# Altium PCB BK5932.PcbDoc (part 1 of 2)
Units mm, origin at the board's own origin, x right, y up, seen from the top; angles counter-clockwise.
Board outline 27.94 x 28.57 mm, 2 copper layers (Top Layer, Bottom Layer); 30 components, 25 nets, 105 pads, 28 vias.
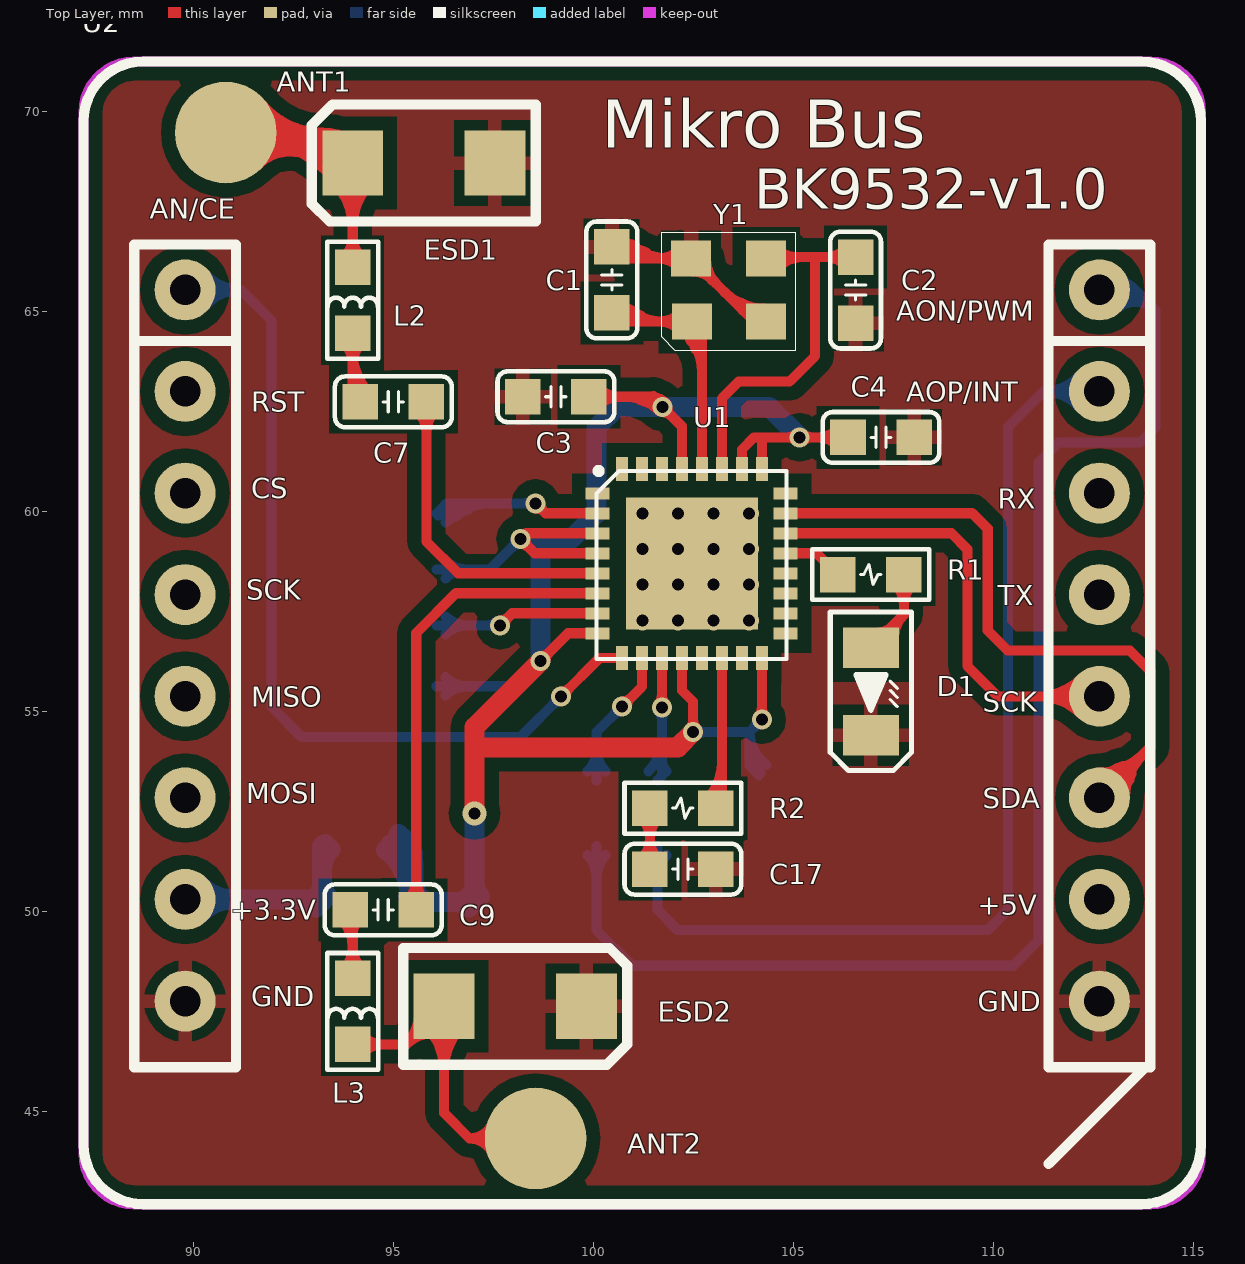
[diagram p0: Top Layer view]
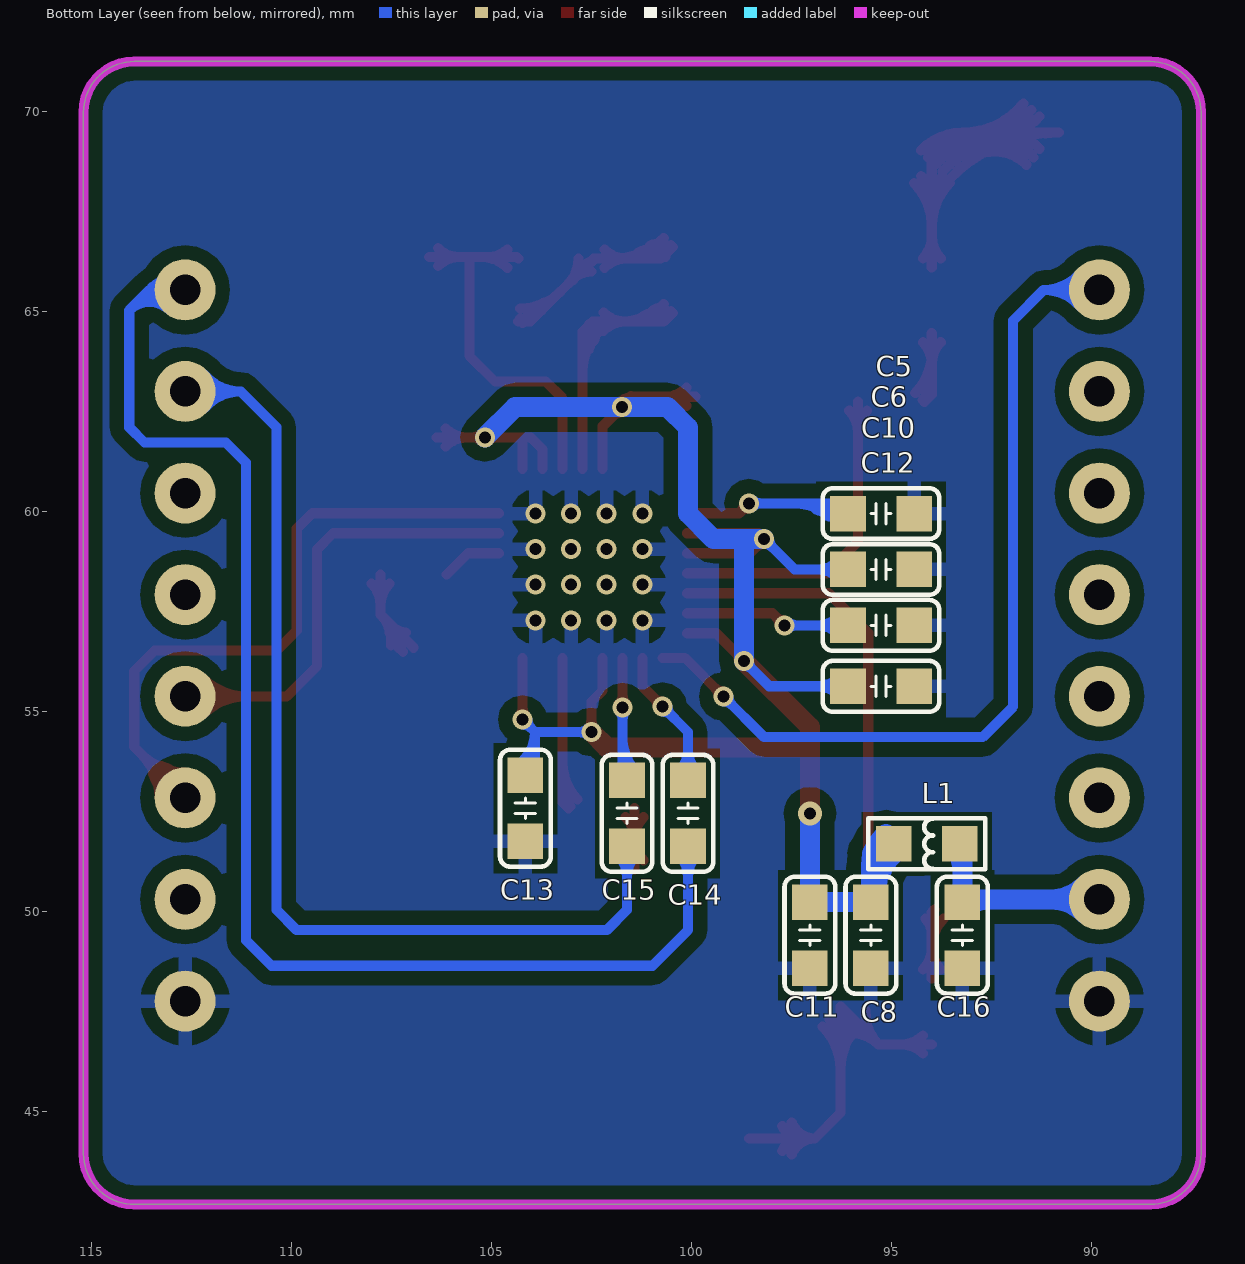
[diagram p1: Bottom Layer view, seen from below]
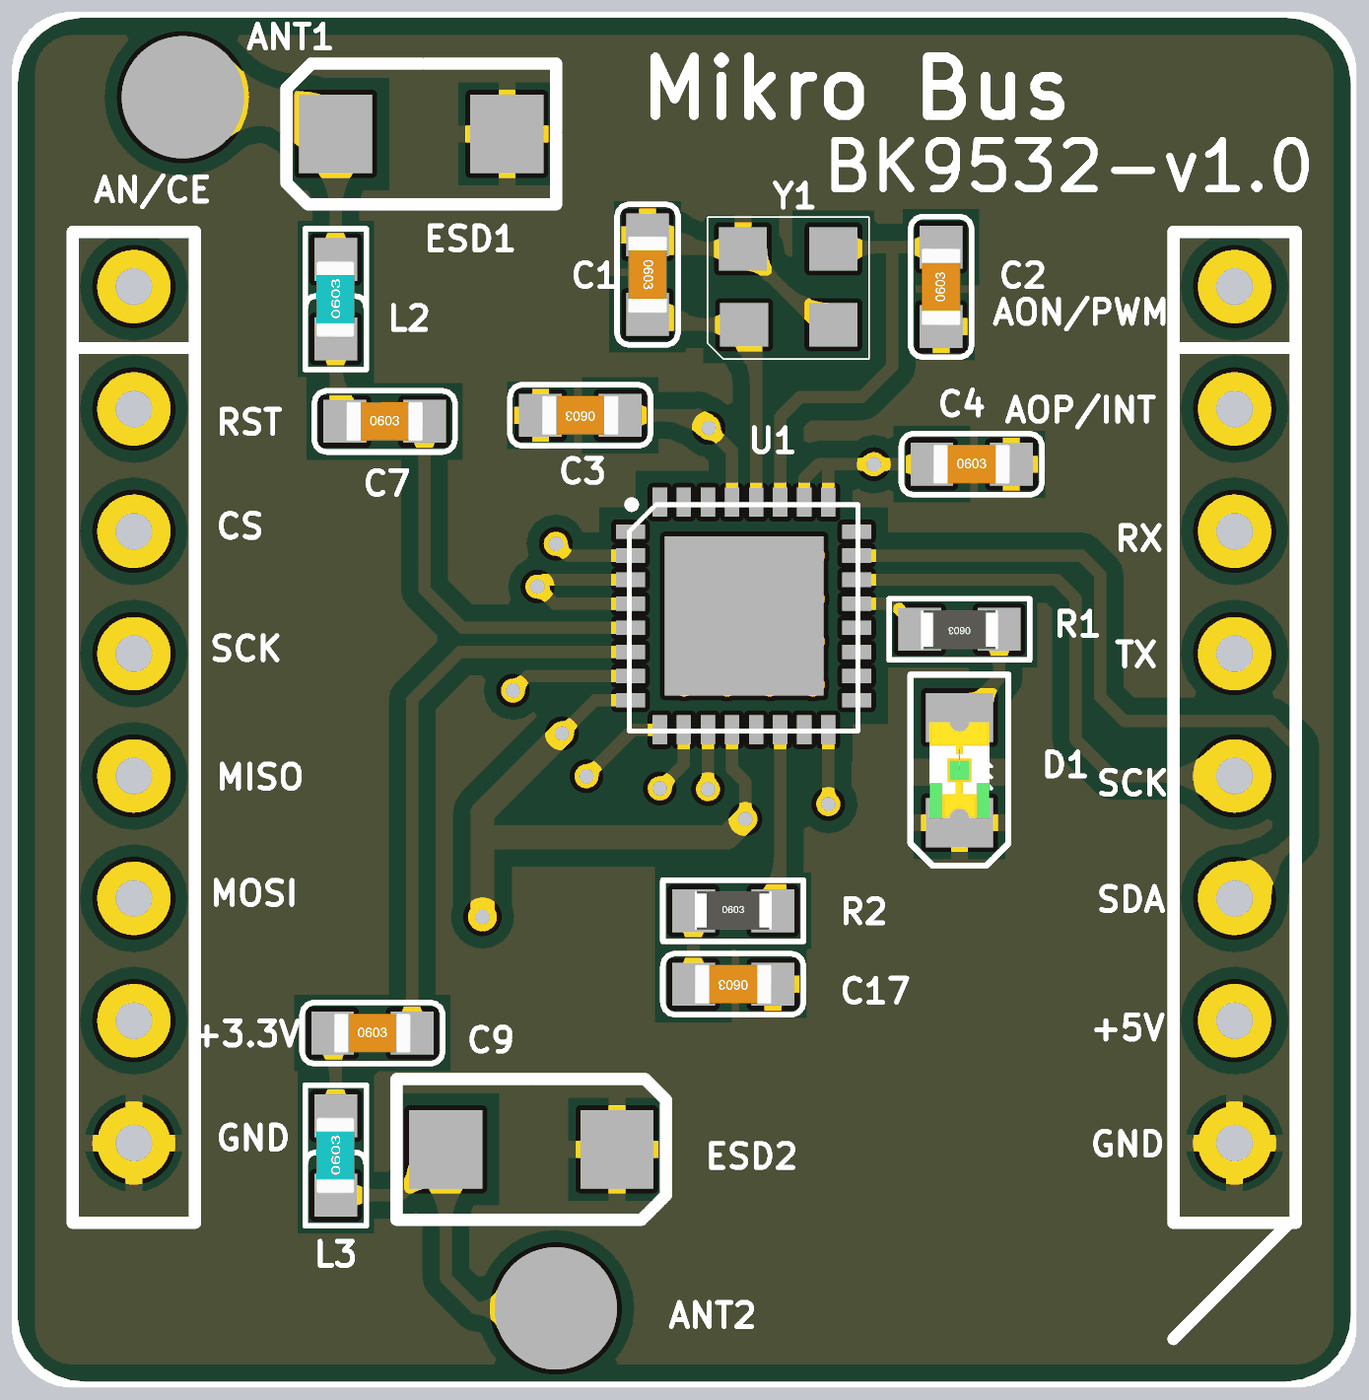
[diagram p3: 3D render of the assembled board from above, using the file's embedded part models]
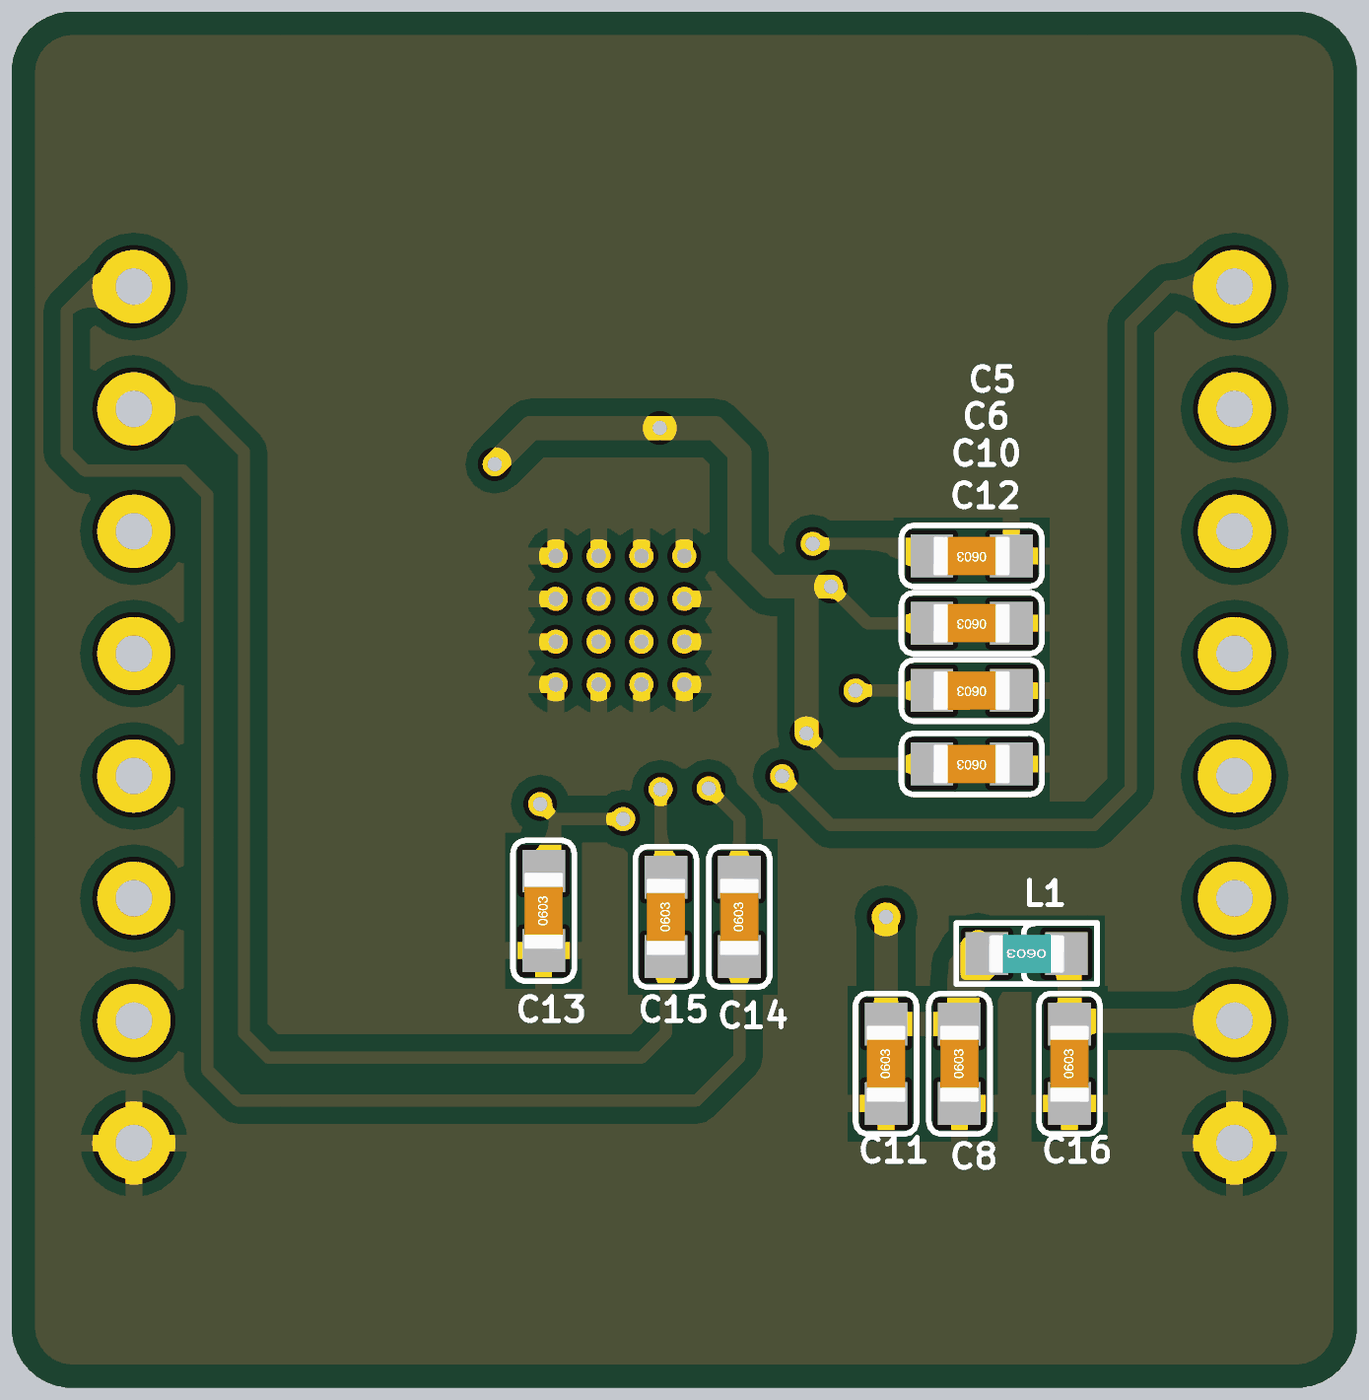
[diagram p4: 3D render of the assembled board from below, using the file's embedded part models]

## Layer stack, top to bottom
Top Layer: signal copper 0.0356
Dielectric: dielectric 0.32, FR-4, Dk 4.8
Bottom Layer: signal copper 0.0356

## Board outline
87.249,43.942 ccw(c88.519,43.942) 88.519,42.672 113.919,42.672 ccw(c113.919,43.942) 115.189,43.942 115.189,69.977 ccw(c113.919,69.977) 113.919,71.247 88.519,71.247 ccw(c88.519,69.977) 87.249,69.977

## Design rules (kind name [scope] priority, off if disabled: settings)
Clearance [All] p1: gap=0.35
PolygonConnect [All] p1: connectstyle=Relief reliefconductorwidth=0.35 reliefentries=4 polygonreliefangle="90 Angle"
RoutingVias [All] p1: holewidth=0.711 width=1.27 viastyle="Through Hole" minholewidth=0.3 minwidth=0.5 maxholewidth=0.711 maxwidth=1.27
SilkscreenOverComponentPads SilkToSolderMaskClearance [IsPad] p1: minsilkscreentomaskgap=0.254
SolderMaskExpansion [All] p1: expansion=0.102
Width [All] p1: maxlimit=1 minlimit=0.254 preferedwidth=0.254
27 further rules are at their usual default settings.

## Components (designator, comment, footprint, x,y, rotation, side; value= is the part's Value field where it differs from the comment)
ANT1 "弹簧天线" ANT 90.805,69.469 r90 top
ANT2 "弹簧天线" ANT 98.552,44.323 r90 top
C1 "10pF" C0603 100.457,65.786 r270 top
C2 "10pF" C0603 106.553,65.532 r90 top
C3 "1uF" C0603 99.06,62.865 r180 top
C4 "1uF" C0603 107.188,61.849 r0 top
C5 "4.7uF" C0603 95.25,59.944 r0 bottom
C6 "1uF" C0603 95.25,58.547 r0 bottom
C7 "30pF" C0603 94.996,62.738 r0 top
C8 "0.1uF" C0603 95.504,49.403 r90 bottom
C9 "30pF" C0603 94.742,50.038 r0 top
C10 "4.7uF" C0603 95.25,57.15 r0 bottom
C11 "10uF" C0603 97.028,49.403 r90 bottom
C12 "1uF" C0603 95.25,55.626 r0 bottom
C13 "1uF" C0603 104.14,52.578 r90 bottom
C14 "2.2uF" C0603 100.076,52.451 r90 bottom
C15 "2.2uF" C0603 101.6,52.451 r90 bottom
C16 "10uF" C0603 93.218,49.403 r90 bottom
C17 "1uF" C0603 102.235,51.054 r180 top
D1 "普红" "LED 0805" 106.934,55.499 r270 top
ESD1 "SMAJ5.0CA" SMAJ 95.758,68.707 r0 top
ESD2 "SMAJ5.0CA" SMAJ 98.044,47.625 r180 top
L1 "1k@100MHz" L0603 94.107,51.689 r0 bottom
L2 "1nH" L0603 93.98,65.278 r90 top
L3 "1nH" L0603 93.98,47.498 r90 top
R1 "1K" R0603 106.934,58.42 r180 top
R2 "27R" R0603 102.235,52.578 r0 top
U1 "BK9532" QFN32 100.711,60.452 r0 top locked
U2 "MikroBus" MikroBus 87.249,71.247 r0 top locked
Y1 "24.576M" "晶振   有源2520" 103.378,65.532 r0 top

## Footprints (in the part's own frame and the unit in brackets; to place one, negate y for a bottom-side part, rotate by r counter-clockwise, add the part's x,y. Pads: shape width x height; smd on the part's side, far side on the other; paste and mask are expansions set on the pad)
ANT [mm] "弹簧天线"
  round 2.54 smd: 1(0,0)
C0603 [mil] "0603-100nF/25V    104K    贴片层叠电容"
  rect 35x35 smd: 1(-32.5,0) 2(32.5,0)
  silkscreen extent -58,-25 58,25, body extent -31,-16 31,16, height 32
L0603 [mil]
  rect 35x35 smd: 1(-32.5,0) 2(32.5,0)
  silkscreen extent -58,-25 58,25, body extent -31,-15 31,16, height 31
"LED 0805" [mil] "普通亮度，高亮绿灯用"
  rect 40x55 smd: 1(-43,0) 2(43,0)
  silkscreen extent -78,-40 78,40, body extent -39,-25 39,25, height 32
MikroBus [mil] "Mikro Bus General Purpose Module"
  round 60 hole 30: 1(1000,-924.8) 2(1000,-824.8) 3(1000,-724.8) 4(1000,-624.8) 5(1000,-524.8) 6(1000,-424.8) 7(1000,-324.8) 8(1000,-224.8) 9(100,-224.8) 10(100,-324.8) 11(100,-424.8) 12(100,-524.8) 13(100,-624.8) 14(100,-724.8) 15(100,-824.8) 16(100,-924.8)
  silkscreen extent 0,-1125 1100,0
QFN32 [mm] "BK953* 5x5"
  rect 0.6x0.3 smd: 1(-0.61,0) 2(-0.61,-0.5) 3(-0.61,-1) 4(-0.61,-1.5) 5(-0.61,-2) 6(-0.61,-2.5) 7(-0.61,-3) 8(-0.61,-3.5) 17(4.089,-3.5) 18(4.089,-3) 19(4.089,-2.5) 20(4.089,-2) 21(4.089,-1.5) 22(4.089,-1) 23(4.089,-0.5) 24(4.089,0)
  rect 0.3x0.6 smd: 9(0,-4.115) 10(0.5,-4.115) 11(1,-4.115) 12(1.5,-4.115) 13(2,-4.115) 14(2.5,-4.115) 15(3,-4.115) 16(3.5,-4.115) 25(3.5,0.61) 26(3,0.61) 27(2.5,0.61) 28(2,0.61) 29(1.5,0.61) 30(1,0.61) 31(0.5,0.61) 32(0,0.61)
  rect 3.3x3.3 smd: 33(1.753,-1.753)
  silkscreen extent -0.64,-4.14 4.11,0.58
R0603 [mil]
  rect 35x35 smd: 1(-32.5,0) 2(32.5,0)
  silkscreen extent -58,-25 58,25, body extent -31,-15 31,16, height 16
SMAJ [mm]
  rect 1.52x1.63 smd: 1(-1.778,0) 2(1.778,0)
  silkscreen extent -2.8,-1.46 2.8,1.46
"晶振   有源2520" [mm]
  rect 1x0.9 smd: 1(-0.914,-0.787) 2(0.94,-0.787) 3(0.94,0.787) 4(-0.94,0.787)
  silkscreen extent -1.68,-1.5 1.68,1.45

## Part data
ANT1 ANT2: library part ANT, "ANT"
C1 C2: library part "CAP 0603-10pF/50V", "0603-10pF/50V 贴片层叠电容"
C3 C4 C5 C6 C8 C10 C11 C12 C13 C14 C15 C16 C17: library part "CAP 0805-68pF/50V", "0805-68pF/50V-J5%贴片层叠电容"
C7 C9: library part "CAP 0603-33pF/50V", "0603-33pF/50V   贴片层叠电容"
D1: library part "LED  0805普亮贴片红灯", "0805普亮贴片红灯"
ESD1 ESD2: library part "ESD 防浪涌二极管", "ESD 二极管"
L1: library part "电感  贴片  33UH", "磁珠"
L2 L3: library part "电感  0603  600R", "0603 600R瓷珠电感"
R1 R2: library part RES1, "1206  K  5%  HS  贴片电阻"
U1: "QFN5x5 32"
Y1: library part "晶振  24.576MHz  49SMD", "（未入库）24.576MHz  2520"

## Via types
v1: diameter 0.5, hole 0.3, Top Layer to Bottom Layer, 27 vias
v2: diameter 0.6, hole 0.3, Top Layer to Bottom Layer, 1 vias

## Nets (pads, with @x,y where several pads share a name; then routed paths per layer and width w, separated by ;. In a path a pad name is that pad's centre, name@x,y a point inside that pad or via, vN(x,y) a via of type N, cw(c..) or ccw(c..) an arc to the next point about the centre after c; other vN are vias at no path point)
+5V: U2.2
AON: C14.1 U2.8 | length 70.1
  Bottom Layer w0.254: C14.1@100.076,51.625 100.076,49.53 100.965,48.641 110.49,48.641 111.125,49.276 111.125,61.214 111.633,61.722 113.665,61.722 114.046,62.103 114.046,65.024 ; U2.8@112.649,65.537 113.533,65.537 ; C14.1@99.851,51.401 cw(c99.309,50.859) 100.076,50.859 ; C14.1@99.851,51.401 cw(c99.309,50.859) 100.076,50.859 ; C14.1@99.851,51.401 cw(c99.309,50.859) 100.076,50.859 ; C14.1@99.851,51.401 cw(c99.309,50.859) 100.076,50.859 ; C14.1@99.851,51.401 cw(c99.309,50.859) 100.076,50.859 ; C14.1@99.851,51.401 cw(c99.309,50.859) 100.076,50.859 ; 100.076,50.859 cw(c100.843,50.859) C14.1@100.301,51.401 ; 100.076,50.859 cw(c100.843,50.859) C14.1@100.301,51.401 ; 100.076,50.859 cw(c100.843,50.859) C14.1@100.301,51.401 ; 100.076,50.859 cw(c100.843,50.859) C14.1@100.301,51.401 ; 100.076,50.859 cw(c100.843,50.859) C14.1@100.301,51.401 ; 100.076,50.859 cw(c100.843,50.859) C14.1@100.301,51.401 ; U2.8@112.566,65.633 cw(c113,65.133) 113.468,65.602 ; U2.8@112.566,65.633 cw(c113,65.133) 113.468,65.602 ; U2.8@112.566,65.633 cw(c113,65.133) 113.468,65.602 ; U2.8@112.566,65.633 cw(c113,65.133) 113.468,65.602 ; U2.8@112.566,65.633 cw(c113,65.133) 113.468,65.602 ; U2.8@112.566,65.633 cw(c113,65.133) 113.468,65.602 ; U2.8@112.732,65.441 cw(c113.179,64.927) 113.661,65.409 ; U2.8@112.732,65.441 cw(c113.179,64.927) 113.661,65.409 ; U2.8@112.732,65.441 cw(c113.179,64.927) 113.661,65.409 ; U2.8@112.732,65.441 cw(c113.179,64.927) 113.661,65.409 ; U2.8@112.732,65.441 cw(c113.179,64.927) 113.661,65.409 ; U2.8@112.732,65.441 cw(c113.179,64.927) 113.661,65.409 ; U2.8@112.899,65.25 cw(c113.359,64.722) 113.853,65.217 ; U2.8@112.899,65.25 cw(c113.359,64.722) 113.853,65.217 ; U2.8@112.899,65.25 cw(c113.359,64.722) 113.853,65.217 ; U2.8@112.899,65.25 cw(c113.359,64.722) 113.853,65.217 ; U2.8@112.899,65.25 cw(c113.359,64.722) 113.853,65.217 ; U2.8@112.899,65.25 cw(c113.359,64.722) 113.853,65.217 ; U2.8@113.066,65.058 cw(c113.538,64.516) 114.046,65.024 ; U2.8@113.066,65.058 cw(c113.538,64.516) 114.046,65.024 ; U2.8@113.066,65.058 cw(c113.538,64.516) 114.046,65.024 ; U2.8@113.066,65.058 cw(c113.538,64.516) 114.046,65.024 ; U2.8@113.066,65.058 cw(c113.538,64.516) 114.046,65.024 ; U2.8@113.066,65.058 cw(c113.538,64.516) 114.046,65.024 ; U2.8@113.251,65.334 cw(c113.533,65.239) 113.533,65.537 ; U2.8@113.251,65.334 cw(c113.533,65.239) 113.533,65.537 ; U2.8@113.251,65.334 cw(c113.533,65.239) 113.533,65.537 ; U2.8@113.251,65.334 cw(c113.533,65.239) 113.533,65.537 ; U2.8@113.251,65.334 cw(c113.533,65.239) 113.533,65.537 ; U2.8@113.251,65.334 cw(c113.533,65.239) 113.533,65.537 ; U2.8@113.251,65.74 ccw(c113.533,65.835) 113.533,65.537 ; U2.8@113.251,65.74 ccw(c113.533,65.835) 113.533,65.537 ; U2.8@113.251,65.74 ccw(c113.533,65.835) 113.533,65.537 ; U2.8@113.251,65.74 ccw(c113.533,65.835) 113.533,65.537 ; U2.8@113.251,65.74 ccw(c113.533,65.835) 113.533,65.537 ; U2.8@113.251,65.74 ccw(c113.533,65.835) 113.533,65.537 ; 113.533,65.537 114.046,65.024
AOP: C15.1 U2.7 | length 52.6
  Bottom Layer w0.254: C15.1@101.6,51.625 101.6,50.038 102.108,49.53 109.855,49.53 110.363,50.038 110.363,62.103 111.257,62.997 ; U2.7@112.649,62.997 111.257,62.997 ; C15.1@101.375,51.401 cw(c100.833,50.859) 101.6,50.859 ; C15.1@101.375,51.401 cw(c100.833,50.859) 101.6,50.859 ; C15.1@101.375,51.401 cw(c100.833,50.859) 101.6,50.859 ; C15.1@101.375,51.401 cw(c100.833,50.859) 101.6,50.859 ; C15.1@101.375,51.401 cw(c100.833,50.859) 101.6,50.859 ; C15.1@101.375,51.401 cw(c100.833,50.859) 101.6,50.859 ; 101.6,50.859 cw(c102.367,50.859) C15.1@101.825,51.401 ; 101.6,50.859 cw(c102.367,50.859) C15.1@101.825,51.401 ; 101.6,50.859 cw(c102.367,50.859) C15.1@101.825,51.401 ; 101.6,50.859 cw(c102.367,50.859) C15.1@101.825,51.401 ; 101.6,50.859 cw(c102.367,50.859) C15.1@101.825,51.401 ; 101.6,50.859 cw(c102.367,50.859) C15.1@101.825,51.401 ; 111.257,62.997 ccw(c111.257,64.205) U2.7@112.169,63.413 ; 111.257,62.997 cw(c111.257,61.789) U2.7@112.169,62.581 ; 111.257,62.997 ccw(c111.257,64.205) U2.7@112.169,63.413 ; 111.257,62.997 cw(c111.257,61.789) U2.7@112.169,62.581 ; 111.257,62.997 ccw(c111.257,64.205) U2.7@112.169,63.413 ; 111.257,62.997 cw(c111.257,61.789) U2.7@112.169,62.581 ; 111.257,62.997 ccw(c111.257,64.205) U2.7@112.169,63.413 ; 111.257,62.997 cw(c111.257,61.789) U2.7@112.169,62.581 ; 111.257,62.997 ccw(c111.257,64.205) U2.7@112.169,63.413 ; 111.257,62.997 cw(c111.257,61.789) U2.7@112.169,62.581 ; 111.257,62.997 ccw(c111.257,64.205) U2.7@112.169,63.413 ; 111.257,62.997 cw(c111.257,61.789) U2.7@112.169,62.581 ; 111.814,62.997 ccw(c111.814,63.722) U2.7@112.361,63.247 ; 111.814,62.997 cw(c111.814,62.272) U2.7@112.361,62.747 ; 111.814,62.997 ccw(c111.814,63.722) U2.7@112.361,63.247 ; 111.814,62.997 cw(c111.814,62.272) U2.7@112.361,62.747 ; 111.814,62.997 ccw(c111.814,63.722) U2.7@112.361,63.247 ; 111.814,62.997 cw(c111.814,62.272) U2.7@112.361,62.747 ; 111.814,62.997 ccw(c111.814,63.722) U2.7@112.361,63.247 ; 111.814,62.997 cw(c111.814,62.272) U2.7@112.361,62.747 ; 111.814,62.997 ccw(c111.814,63.722) U2.7@112.361,63.247 ; 111.814,62.997 cw(c111.814,62.272) U2.7@112.361,62.747 ; 111.814,62.997 ccw(c111.814,63.722) U2.7@112.361,63.247 ; 111.814,62.997 cw(c111.814,62.272) U2.7@112.361,62.747
GND: C1.1 C2.1 C3.2 C4.2 C5.1 C6.1 C8.1 C10.1 C11.1 C12.1 C13.1 C16.1 C17.1 D1.2 ESD1.2 ESD2.1 U1.33 U2.1 U2.16 Y1.2 Y1.4 | length 89.5
  Top Layer w0.254: C1.1@100.457,66.611 100.749,66.319 Y1.4@102.438,66.319 104.013,64.745 Y1.2@104.318,64.745 ; C1.1@100.502,66.566 cw(c100.811,66.254) 101.031,66.635 ; C1.1@100.502,66.566 cw(c100.811,66.254) 101.031,66.635 ; C1.1@100.502,66.566 cw(c100.811,66.254) 101.031,66.635 ; C1.1@100.502,66.566 cw(c100.811,66.254) 101.031,66.635 ; C1.1@100.502,66.566 cw(c100.811,66.254) 101.031,66.635 ; C1.1@100.502,66.566 cw(c100.811,66.254) 101.031,66.635 ; C1.1@100.502,66.566 cw(c100.811,66.254) 101.031,66.635 ; C1.1@100.502,66.566 cw(c100.811,66.254) 101.031,66.635 ; C1.1@100.502,66.566 cw(c100.811,66.254) 101.031,66.635 ; C1.1@100.502,66.566 cw(c100.811,66.254) 101.031,66.635 ; C1.1@100.502,66.566 cw(c100.811,66.254) 101.031,66.635 ; C1.1@100.502,66.566 cw(c100.811,66.254) 101.031,66.635 ; C1.1@100.502,66.566 cw(c100.811,66.254) 101.031,66.635 ; C1.1@100.502,66.566 cw(c100.811,66.254) 101.031,66.635 ; C1.1@100.502,66.566 cw(c100.811,66.254) 101.031,66.635 ; C1.1@100.502,66.656 ccw(c101.315,67.47) 101.315,66.319 ; C1.1@100.502,66.656 ccw(c101.315,67.47) 101.315,66.319 ; C1.1@100.502,66.656 ccw(c101.315,67.47) 101.315,66.319 ; C1.1@100.502,66.656 ccw(c101.315,67.47) 101.315,66.319 ; C1.1@100.502,66.656 ccw(c101.315,67.47) 101.315,66.319 ; C1.1@100.502,66.656 ccw(c101.315,67.47) 101.315,66.319 ; C1.1@100.646,66.357 cw(c100.832,66.107) 100.987,66.376 ; C1.1@100.646,66.357 cw(c100.832,66.107) 100.987,66.376 ; C1.1@100.646,66.357 cw(c100.832,66.107) 100.987,66.376 ; C1.1@100.646,66.357 cw(c100.832,66.107) 100.987,66.376 ; C1.1@100.646,66.357 cw(c100.832,66.107) 100.987,66.376 ; C1.1@100.646,66.357 cw(c100.832,66.107) 100.987,66.376 ; C1.1@100.646,66.357 cw(c100.832,66.107) 100.987,66.376 ; C1.1@100.646,66.357 cw(c100.832,66.107) 100.987,66.376 ; C1.1@100.646,66.357 cw(c100.832,66.107) 100.987,66.376 ; C1.1@100.646,66.357 cw(c100.832,66.107) 100.987,66.376 ; C1.1@100.646,66.357 cw(c100.832,66.107) 100.987,66.376 ; C1.1@100.646,66.357 cw(c100.832,66.107) 100.987,66.376 ; C1.1@100.646,66.357 cw(c100.832,66.107) 100.987,66.376 ; C1.1@100.646,66.357 cw(c100.832,66.107) 100.987,66.376 ; C1.1@100.646,66.357 cw(c100.832,66.107) 100.987,66.376 ; C1.1@100.68,66.386 cw(c101.053,66.008) 101.319,66.468 ; C1.1@100.68,66.386 cw(c101.053,66.008) 101.319,66.468 ; C1.1@100.68,66.386 cw(c101.053,66.008) 101.319,66.468 ; C1.1@100.68,66.386 cw(c101.053,66.008) 101.319,66.468 ; C1.1@100.68,66.386 cw(c101.053,66.008) 101.319,66.468 ; C1.1@100.68,66.386 cw(c101.053,66.008) 101.319,66.468 ; C1.1@100.68,66.386 cw(c101.053,66.008) 101.319,66.468 ; C1.1@100.68,66.386 cw(c101.053,66.008) 101.319,66.468 ; C1.1@100.68,66.386 cw(c101.053,66.008) 101.319,66.468 ; C1.1@100.68,66.386 cw(c101.053,66.008) 101.319,66.468 ; C1.1@100.68,66.386 cw(c101.053,66.008) 101.319,66.468 ; C1.1@100.68,66.386 cw(c101.053,66.008) 101.319,66.468 ; C1.1@100.68,66.386 cw(c101.053,66.008) 101.319,66.468 ; C1.1@100.68,66.386 cw(c101.053,66.008) 101.319,66.468 ; C1.1@100.68,66.386 cw(c101.053,66.008) 101.319,66.468 ; C1.1@100.682,66.836 ccw(c101.929,68.083) 101.929,66.319 ; C1.1@100.682,66.836 ccw(c101.929,68.083) 101.929,66.319 ; C1.1@100.682,66.836 ccw(c101.929,68.083) 101.929,66.319 ; C1.1@100.682,66.836 ccw(c101.929,68.083) 101.929,66.319 ; C1.1@100.682,66.836 ccw(c101.929,68.083) 101.929,66.319 ; C1.1@100.682,66.836 ccw(c101.929,68.083) 101.929,66.319 ; C1.1@100.767,66.678 ccw(c101.217,66.774) 100.987,66.376 ; C1.1@100.767,66.678 ccw(c101.217,66.774) 100.987,66.376 ; C1.1@100.767,66.678 ccw(c101.217,66.774) 100.987,66.376 ; C1.1@100.767,66.678 ccw(c101.217,66.774) 100.987,66.376 ; C1.1@100.767,66.678 ccw(c101.217,66.774) 100.987,66.376 ; C1.1@100.767,66.678 ccw(c101.217,66.774) 100.987,66.376 ; C1.1@100.767,66.678 ccw(c101.217,66.774) 100.987,66.376 ; C1.1@100.767,66.678 ccw(c101.217,66.774) 100.987,66.376 ; C1.1@100.767,66.678 ccw(c101.217,66.774) 100.987,66.376 ; C1.1@100.767,66.678 ccw(c101.217,66.774) 100.987,66.376 ; C1.1@100.767,66.678 ccw(c101.217,66.774) 100.987,66.376 ; C1.1@100.767,66.678 ccw(c101.217,66.774) 100.987,66.376 ; C1.1@100.767,66.678 ccw(c101.217,66.774) 100.987,66.376 ; C1.1@100.767,66.678 ccw(c101.217,66.774) 100.987,66.376 ; C1.1@100.767,66.678 ccw(c101.217,66.774) 100.987,66.376 ; 101.608,66.319 ccw(c101.608,67.099) Y1.4@102.16,66.548 ; 101.608,66.319 cw(c101.608,65.54) Y1.4@102.16,66.091 ; 101.608,66.319 ccw(c101.608,67.099) Y1.4@102.16,66.548 ; 101.608,66.319 cw(c101.608,65.54) Y1.4@102.16,66.091 ; 101.608,66.319 ccw(c101.608,67.099) Y1.4@102.16,66.548 ; 101.608,66.319 cw(c101.608,65.54) Y1.4@102.16,66.091 ; 101.608,66.319 ccw(c101.608,67.099) Y1.4@102.16,66.548 ; 101.608,66.319 cw(c101.608,65.54) Y1.4@102.16,66.091 ; 101.608,66.319 ccw(c101.608,67.099) Y1.4@102.16,66.548 ; 101.608,66.319 cw(c101.608,65.54) Y1.4@102.16,66.091 ; 101.608,66.319 ccw(c101.608,67.099) Y1.4@102.16,66.548 ; 101.608,66.319 cw(c101.608,65.54) Y1.4@102.16,66.091 ; Y1.4@102.471,66.253 cw(c102.299,65.592) 102.959,65.768 ; Y1.4@102.471,66.253 cw(c102.299,65.592) 102.959,65.768 ; Y1.4@102.471,66.253 cw(c102.299,65.592) 102.959,65.768 ; Y1.4@102.471,66.253 cw(c102.299,65.592) 102.959,65.768 ; Y1.4@102.471,66.253 cw(c102.299,65.592) 102.959,65.768 ; Y1.4@102.471,66.253 cw(c102.299,65.592) 102.959,65.768 ; Y1.4@102.471,66.253 cw(c102.299,65.592) 102.959,65.768 ; Y1.4@102.471,66.253 cw(c102.299,65.592) 102.959,65.768 ; Y1.4@102.471,66.253 cw(c102.299,65.592) 102.959,65.768 ; Y1.4@102.471,66.253 cw(c102.299,65.592) 102.959,65.768 ; Y1.4@102.471,66.253 cw(c102.299,65.592) 102.959,65.768 ; Y1.4@102.471,66.253 cw(c102.299,65.592) 102.959,65.768 ; Y1.4@102.471,66.253 cw(c102.299,65.592) 102.959,65.768 ; Y1.4@102.471,66.253 cw(c102.299,65.592) 102.959,65.768 ; Y1.4@102.471,66.253 cw(c102.299,65.592) 102.959,65.768 ; Y1.4@102.488,65.996 cw(c102.488,65.337) 102.954,65.803 ; Y1.4@102.488,65.996 cw(c102.488,65.337) 102.954,65.803 ; Y1.4@102.488,65.996 cw(c102.488,65.337) 102.954,65.803 ; Y1.4@102.488,65.996 cw(c102.488,65.337) 102.954,65.803 ; Y1.4@102.488,65.996 cw(c102.488,65.337) 102.954,65.803 ; Y1.4@102.488,65.996 cw(c102.488,65.337) 102.954,65.803 ; Y1.4@102.811,66.319 ccw(c103.712,66.319) 103.075,65.683 ; Y1.4@102.811,66.319 ccw(c103.712,66.319) 103.075,65.683 ; Y1.4@102.811,66.319 ccw(c103.712,66.319) 103.075,65.683 ; Y1.4@102.811,66.319 ccw(c103.712,66.319) 103.075,65.683 ; Y1.4@102.811,66.319 ccw(c103.712,66.319) 103.075,65.683 ; Y1.4@102.811,66.319 ccw(c103.712,66.319) 103.075,65.683 ; 103.281,65.476 ccw(c104.268,66.463) Y1.2@104.268,65.068 ; 103.281,65.476 ccw(c104.268,66.463) Y1.2@104.268,65.068 ; 103.281,65.476 ccw(c104.268,66.463) Y1.2@104.268,65.068 ; 103.568,65.255 cw(c103.316,64.311) Y1.2@104.205,64.716 ; 103.568,65.255 cw(c103.316,64.311) Y1.2@104.205,64.716 ; 103.568,65.255 cw(c103.316,64.311) Y1.2@104.205,64.716 ; 103.568,65.255 cw(c103.316,64.311) Y1.2@104.205,64.716 ; 103.568,65.255 cw(c103.316,64.311) Y1.2@104.205,64.716 ; 103.568,65.255 cw(c103.316,64.311) Y1.2@104.205,64.716 ; 103.568,65.255 cw(c103.316,64.311) Y1.2@104.205,64.716 ; 103.568,65.255 cw(c103.316,64.311) Y1.2@104.205,64.716 ; 103.568,65.255 cw(c103.316,64.311) Y1.2@104.205,64.716 ; 103.568,65.255 cw(c103.316,64.311) Y1.2@104.205,64.716 ; 103.568,65.255 cw(c103.316,64.311) Y1.2@104.205,64.716 ; 103.568,65.255 cw(c103.316,64.311) Y1.2@104.205,64.716 ; 103.715,65.043 ccw(c104.268,65.595) Y1.2@104.268,64.814 ; 103.715,65.043 ccw(c104.268,65.595) Y1.2@104.268,64.814 ; 103.715,65.043 ccw(c104.268,65.595) Y1.2@104.268,64.814
  other v1: 101.219,57.277 102.108,57.277 102.997,57.277 103.886,57.277 101.219,58.166 102.108,58.166 102.997,58.166 103.886,58.166 101.219,59.055 102.108,59.055 102.997,59.055 103.886,59.055 101.219,59.944 102.108,59.944 102.997,59.944 103.886,59.944
NetANT1_1: ANT1.1 ESD1.1 L2.2 | length 41.6
  Top Layer w0.254: ANT1.1@91.296,69.067 cw(c92.146,68.372) 92.146,69.469 cw(c92.146,70.566) ANT1.1@91.296,69.871 ; ANT1.1@91.407,69.469 cw(c91.407,66.257) ESD1.1@93.708,68.498 ; ANT1.1@91.437,68.844 cw(c92.057,68.232) 92.282,69.073 cw(c92.507,69.914) ANT1.1@91.665,69.694 ; ANT1.1@91.493,68.906 cw(c92.682,67.933) 92.682,69.469 cw(c92.682,71.005) ANT1.1@91.493,70.032 ; ANT1.1@91.572,69.019 cw(c92.067,68.728) 92.196,69.288 ; ANT1.1@91.618,68.666 cw(c92.414,67.879) 92.704,68.96 cw(c92.994,70.042) ANT1.1@91.911,69.758 ; ANT1.1@91.655,69.729 ccw(c92.243,69.908) 92.106,69.309 ; ANT1.1@91.689,68.745 cw(c93.218,67.494) 93.218,69.469 ; ANT1.1@91.689,70.193 ccw(c93.218,71.444) 93.218,69.469 ; ANT1.1@91.791,68.89 cw(c92.381,68.544) 92.533,69.211 cw(c92.727,70.056) ANT1.1@91.898,69.803 ; ANT1.1@91.915,69.742 ccw(c92.321,69.842) 92.255,69.43 ccw(c92.208,69.135) ANT1.1@91.917,69.204 ; ANT1.1@92.009,69.469 cw(c92.009,66.843) ESD1.1@93.89,68.675 ; 92.611,69.469 cw(c92.611,67.429) ESD1.1@94.072,68.852 ; 93.212,69.469 cw(c93.212,68.015) ESD1.1@94.254,69.029 ; ESD1.1@93.526,68.32 ccw(c90.805,65.671) ANT1.1@90.805,69.469 93.218,69.469 ; ESD1.1@93.532,68.204 cw(c92.452,67.124) 93.98,67.124 cw(c95.508,67.124) ESD1.1@94.428,68.204 ; ESD1.1@93.712,68.384 cw(c93.065,67.737) 93.98,67.737 cw(c94.895,67.737) ESD1.1@94.248,68.384 ; L2.2@93.755,66.328 ccw(c93.213,66.87) 93.98,66.87 ccw(c94.747,66.87) L2.2@94.205,66.328 ; L2.2@93.98,66.103 ESD1.1@93.98,68.707 93.218,69.469 ; 93.218,69.469 ccw(c93.576,69.827) ESD1.1@93.755,69.354 ; 93.218,69.469 cw(c92.814,69.064) ESD1.1@93.367,68.921 ; 93.218,69.469 ccw(c93.576,69.827) ESD1.1@93.755,69.354 ; 93.218,69.469 cw(c92.814,69.064) ESD1.1@93.367,68.921 ; 93.218,69.469 ccw(c93.576,69.827) ESD1.1@93.755,69.354 ; 93.218,69.469 cw(c92.814,69.064) ESD1.1@93.367,68.921
NetANT2_1: ANT2.1 ESD2.2 L3.1 | length 18.1
  Top Layer w0.254: L3.1@93.98,46.672 95.313,46.672 ; L3.1@94.205,46.448 cw(c94.747,45.906) 94.747,46.672 cw(c94.747,47.439) L3.1@94.205,46.897 ; ESD2.2@95.634,47.527 cw(c94.533,47.453) 95.314,46.673 ; ESD2.2@95.663,47.022 cw(c96.103,46.582) ESD2.2@96.204,47.196 ; ESD2.2@95.818,47.122 cw(c94.738,46.042) 96.266,46.042 cw(c97.794,46.042) ESD2.2@96.714,47.122 ; ESD2.2@95.998,47.302 cw(c95.351,46.655) 96.266,46.655 cw(c97.181,46.655) ESD2.2@96.534,47.302 ; ESD2.2@96.163,46.945 ccw(c96.004,45.982) 95.314,46.673 ; ANT2.1@97.482,43.921 ccw(c96.901,43.702) 96.901,44.323 ; ANT2.1@97.482,44.725 cw(c96.901,44.944) 96.901,44.323 ; ANT2.1@97.72,44.01 ccw(c97.268,43.84) 97.268,44.323 ccw(c97.268,44.806) ANT2.1@97.72,44.636 ; ANT2.1@98.552,44.323 96.901,44.323 ; 95.313,46.672 ESD2.2@96.266,47.625 96.266,44.958 96.901,44.323
NetC1_2: C1.2 U1.28 Y1.1 | length 56.9
  Top Layer w0.254: C1.2@100.457,64.96 100.673,64.745 Y1.1@102.464,64.745 102.711,64.497 U1.28@102.711,61.062 ; C1.2@100.502,65.005 ccw(c101.132,65.635) 101.132,64.745 ; C1.2@100.502,65.005 ccw(c101.132,65.635) 101.132,64.745 ; C1.2@100.502,65.005 ccw(c101.132,65.635) 101.132,64.745 ; C1.2@100.502,65.005 ccw(c101.132,65.635) 101.132,64.745 ; C1.2@100.502,65.005 ccw(c101.132,65.635) 101.132,64.745 ; C1.2@100.509,64.924 cw(c100.79,64.726) 100.961,65.023 ; C1.2@100.509,64.924 cw(c100.79,64.726) 100.961,65.023 ; C1.2@100.509,64.924 cw(c100.79,64.726) 100.961,65.023 ; C1.2@100.509,64.924 cw(c100.79,64.726) 100.961,65.023 ; C1.2@100.509,64.924 cw(c100.79,64.726) 100.961,65.023 ; C1.2@100.509,64.924 cw(c100.79,64.726) 100.961,65.023 ; C1.2@100.509,64.924 cw(c100.79,64.726) 100.961,65.023 ; C1.2@100.509,64.924 cw(c100.79,64.726) 100.961,65.023 ; C1.2@100.509,64.924 cw(c100.79,64.726) 100.961,65.023 ; C1.2@100.682,65.185 ccw(c101.745,66.248) 101.745,64.745 ; C1.2@100.682,65.185 ccw(c101.745,66.248) 101.745,64.745 ; C1.2@100.682,65.185 ccw(c101.745,66.248) 101.745,64.745 ; C1.2@100.682,65.185 ccw(c101.745,66.248) 101.745,64.745 ; C1.2@100.682,65.185 ccw(c101.745,66.248) 101.745,64.745 ; C1.2@100.716,64.778 cw(c101.018,64.565) 101.202,64.884 ; C1.2@100.716,64.778 cw(c101.018,64.565) 101.202,64.884 ; C1.2@100.716,64.778 cw(c101.018,64.565) 101.202,64.884 ; C1.2@100.716,64.778 cw(c101.018,64.565) 101.202,64.884 ; C1.2@100.716,64.778 cw(c101.018,64.565) 101.202,64.884 ; C1.2@100.716,64.778 cw(c101.018,64.565) 101.202,64.884 ; C1.2@100.716,64.778 cw(c101.018,64.565) 101.202,64.884 ; C1.2@100.716,64.778 cw(c101.018,64.565) 101.202,64.884 ; C1.2@100.716,64.778 cw(c101.018,64.565) 101.202,64.884 ; 101.634,64.745 ccw(c101.634,65.524) Y1.1@102.185,64.973 ; 101.634,64.745 cw(c101.634,63.965) Y1.1@102.185,64.516 ; 101.634,64.745 ccw(c101.634,65.524) Y1.1@102.185,64.973 ; 101.634,64.745 cw(c101.634,63.965) Y1.1@102.185,64.516 ; 101.634,64.745 ccw(c101.634,65.524) Y1.1@102.185,64.973 ; 101.634,64.745 cw(c101.634,63.965) Y1.1@102.185,64.516 ; 101.634,64.745 ccw(c101.634,65.524) Y1.1@102.185,64.973 ; 101.634,64.745 cw(c101.634,63.965) Y1.1@102.185,64.516 ; 101.634,64.745 ccw(c101.634,65.524) Y1.1@102.185,64.973 ; 101.634,64.745 cw(c101.634,63.965) Y1.1@102.185,64.516 ; Y1.1@102.285,64.516 cw(c101.257,63.488) 102.711,63.488 ; Y1.1@102.285,64.516 cw(c101.257,63.488) 102.711,63.488 ; Y1.1@102.285,64.516 cw(c101.257,63.488) 102.711,63.488 ; Y1.1@102.285,64.516 cw(c101.257,63.488) 102.711,63.488 ; Y1.1@102.285,64.516 cw(c101.257,63.488) 102.711,63.488 ; Y1.1@102.285,64.516 cw(c101.257,63.488) 102.711,63.488 ; 102.44,64.248 cw(c102.721,64.41) Y1.1@102.55,64.686 ; 102.44,64.248 cw(c102.721,64.41) Y1.1@102.55,64.686 ; 102.44,64.248 cw(c102.721,64.41) Y1.1@102.55,64.686 ; 102.44,64.248 cw(c102.721,64.41) Y1.1@102.55,64.686 ; 102.44,64.248 cw(c102.721,64.41) Y1.1@102.55,64.686 ; 102.44,64.248 cw(c102.721,64.41) Y1.1@102.55,64.686 ; 102.44,64.248 cw(c102.721,64.41) Y1.1@102.55,64.686 ; 102.44,64.248 cw(c102.721,64.41) Y1.1@102.55,64.686 ; 102.44,64.248 cw(c102.721,64.41) Y1.1@102.55,64.686 ; 102.44,64.248 cw(c102.721,64.41) Y1.1@102.55,64.686 ; 102.44,64.248 cw(c102.721,64.41) Y1.1@102.55,64.686 ; 102.44,64.248 cw(c102.721,64.41) Y1.1@102.55,64.686 ; 102.44,64.248 cw(c102.721,64.41) Y1.1@102.55,64.686 ; 102.44,64.248 cw(c102.721,64.41) Y1.1@102.55,64.686 ; 102.44,64.248 cw(c102.721,64.41) Y1.1@102.55,64.686 ; Y1.1@102.465,64.696 cw(c101.87,64.101) 102.711,64.101 ; Y1.1@102.465,64.696 cw(c101.87,64.101) 102.711,64.101 ; Y1.1@102.465,64.696 cw(c101.87,64.101) 102.711,64.101 ; Y1.1@102.465,64.696 cw(c101.87,64.101) 102.711,64.101 ; Y1.1@102.465,64.696 cw(c101.87,64.101) 102.711,64.101 ; Y1.1@102.465,64.696 cw(c101.87,64.101) 102.711,64.101 ; 102.571,64.021 cw(c102.86,64.187) Y1.1@102.684,64.47 ; 102.571,64.021 cw(c102.86,64.187) Y1.1@102.684,64.47 ; 102.571,64.021 cw(c102.86,64.187) Y1.1@102.684,64.47 ; 102.571,64.021 cw(c102.86,64.187) Y1.1@102.684,64.47 ; 102.571,64.021 cw(c102.86,64.187) Y1.1@102.684,64.47 ; 102.571,64.021 cw(c102.86,64.187) Y1.1@102.684,64.47 ; 102.571,64.021 cw(c102.86,64.187) Y1.1@102.684,64.47 ; 102.571,64.021 cw(c102.86,64.187) Y1.1@102.684,64.47 ; 102.571,64.021 cw(c102.86,64.187) Y1.1@102.684,64.47 ; 102.571,64.021 cw(c102.86,64.187) Y1.1@102.684,64.47 ; 102.571,64.021 cw(c102.86,64.187) Y1.1@102.684,64.47 ; 102.571,64.021 cw(c102.86,64.187) Y1.1@102.684,64.47 ; 102.571,64.021 cw(c102.86,64.187) Y1.1@102.684,64.47 ; 102.571,64.021 cw(c102.86,64.187) Y1.1@102.684,64.47 ; 102.571,64.021 cw(c102.86,64.187) Y1.1@102.684,64.47
NetC2_2: C2.2 U1.27 Y1.3 | length 23.8
  Top Layer w0.254: U1.27@103.211,61.062 103.211,62.825 103.632,63.246 104.902,63.246 105.537,63.881 105.537,66.358 ; Y1.3@104.318,66.319 104.356,66.358 C2.2@106.553,66.358 ; Y1.3@104.596,66.091 cw(c105.24,65.448) 105.24,66.358 ; Y1.3@104.596,66.091 cw(c105.24,65.448) 105.24,66.358 ; Y1.3@104.596,66.091 cw(c105.24,65.448) 105.24,66.358 ; Y1.3@104.596,66.091 cw(c105.24,65.448) 105.24,66.358 ; Y1.3@104.596,66.091 cw(c105.24,65.448) 105.24,66.358 ; Y1.3@104.596,66.091 cw(c105.24,65.448) 105.24,66.358 ; Y1.3@104.596,66.548 ccw(c105.056,67.007) 105.056,66.358 ; Y1.3@104.596,66.548 ccw(c105.056,67.007) 105.056,66.358 ; Y1.3@104.596,66.548 ccw(c105.056,67.007) 105.056,66.358 ; Y1.3@104.596,66.548 ccw(c105.056,67.007) 105.056,66.358 ; Y1.3@104.596,66.548 ccw(c105.056,67.007) 105.056,66.358 ; Y1.3@104.596,66.548 ccw(c105.056,67.007) 105.056,66.358 ; 105.786,66.358 ccw(c105.786,67.124) C2.2@106.328,66.582 ; 105.786,66.358 cw(c105.786,65.591) C2.2@106.328,66.133 ; 105.786,66.358 ccw(c105.786,67.124) C2.2@106.328,66.582 ; 105.786,66.358 cw(c105.786,65.591) C2.2@106.328,66.133 ; 105.786,66.358 ccw(c105.786,67.124) C2.2@106.328,66.582 ; 105.786,66.358 cw(c105.786,65.591) C2.2@106.328,66.133 ; 105.786,66.358 ccw(c105.786,67.124) C2.2@106.328,66.582 ; 105.786,66.358 cw(c105.786,65.591) C2.2@106.328,66.133 ; 105.786,66.358 ccw(c105.786,67.124) C2.2@106.328,66.582 ; 105.786,66.358 cw(c105.786,65.591) C2.2@106.328,66.133 ; 105.786,66.358 ccw(c105.786,67.124) C2.2@106.328,66.582 ; 105.786,66.358 cw(c105.786,65.591) C2.2@106.328,66.133

## Text inside footprints (layer, text, board x,y; h text height)
U2: Top Overlay "Mikro Bus" at 100.203,69.088 h1.2